# Altium PCB MAGI'sDIPBoard-MBH.PcbDoc
Units mil, origin at the board's own origin, x right, y up, seen from the top; angles counter-clockwise.
Board outline 6000 x 4000 mil, 2 copper layers (Top Layer, Bottom Layer); 26 components, 42 nets, 116 pads, 0 vias.
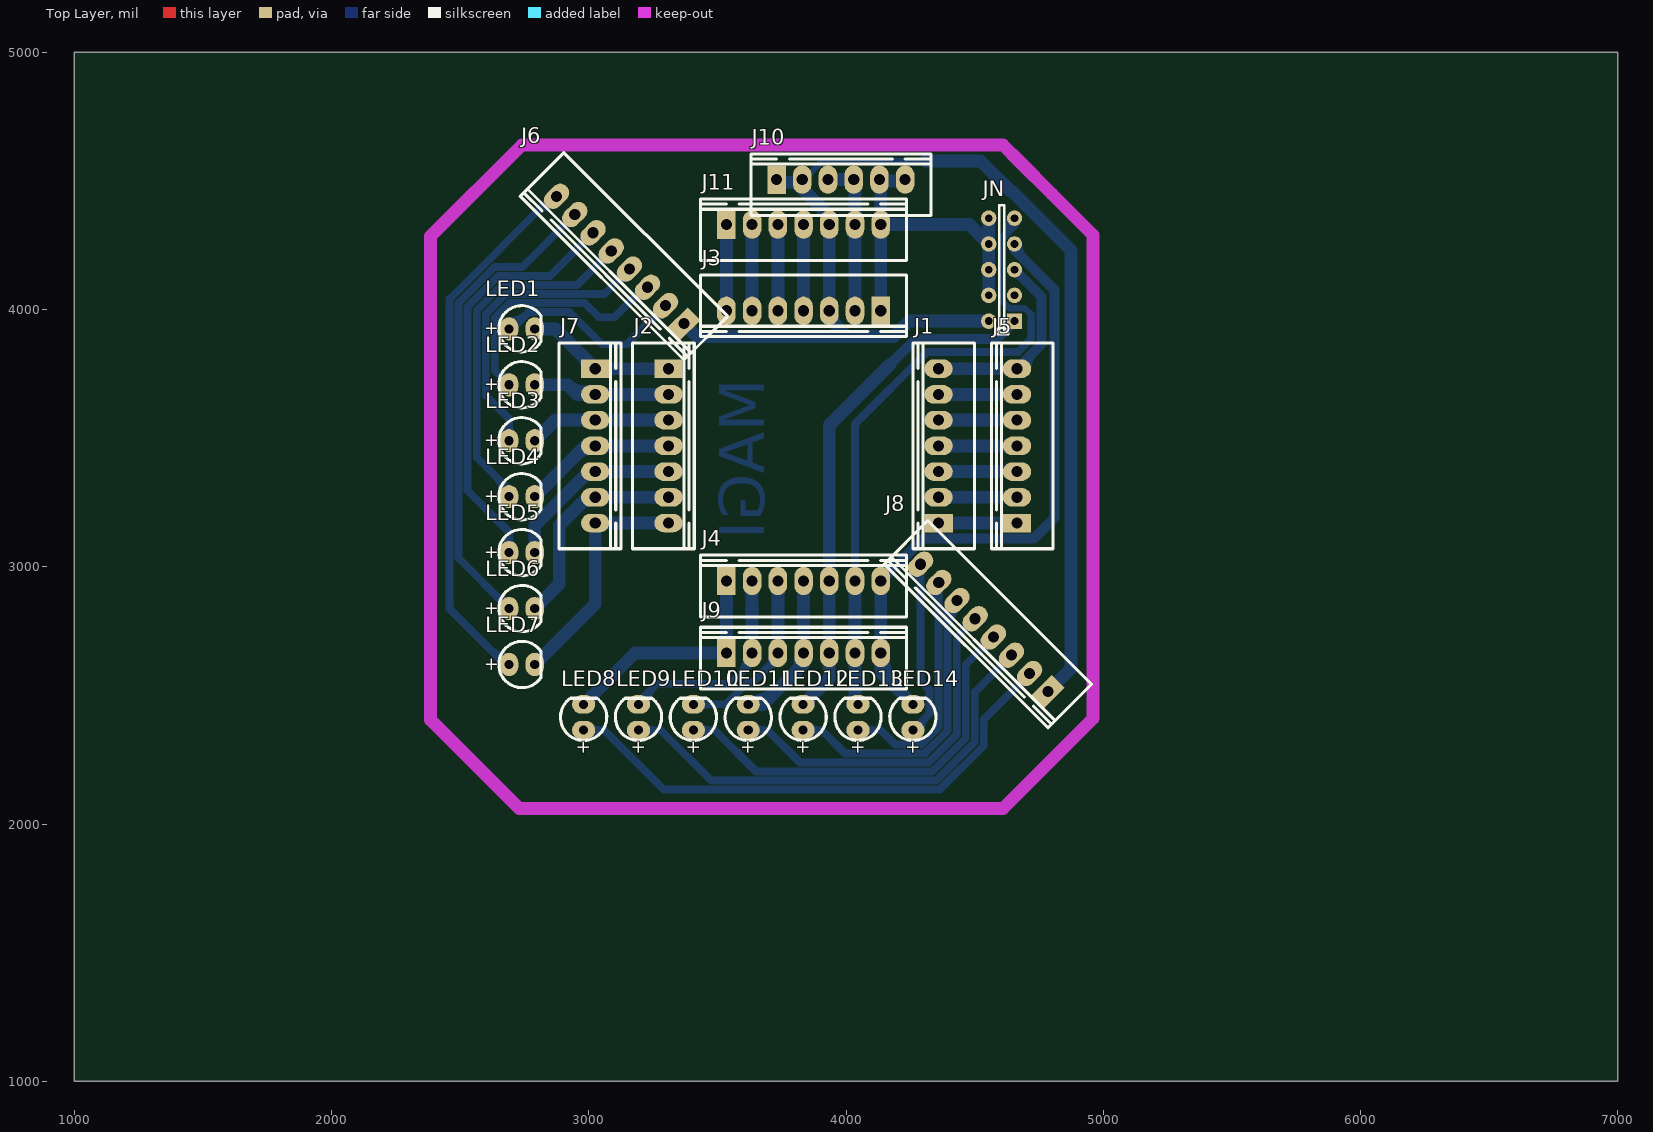
[diagram p0: Top Layer view]
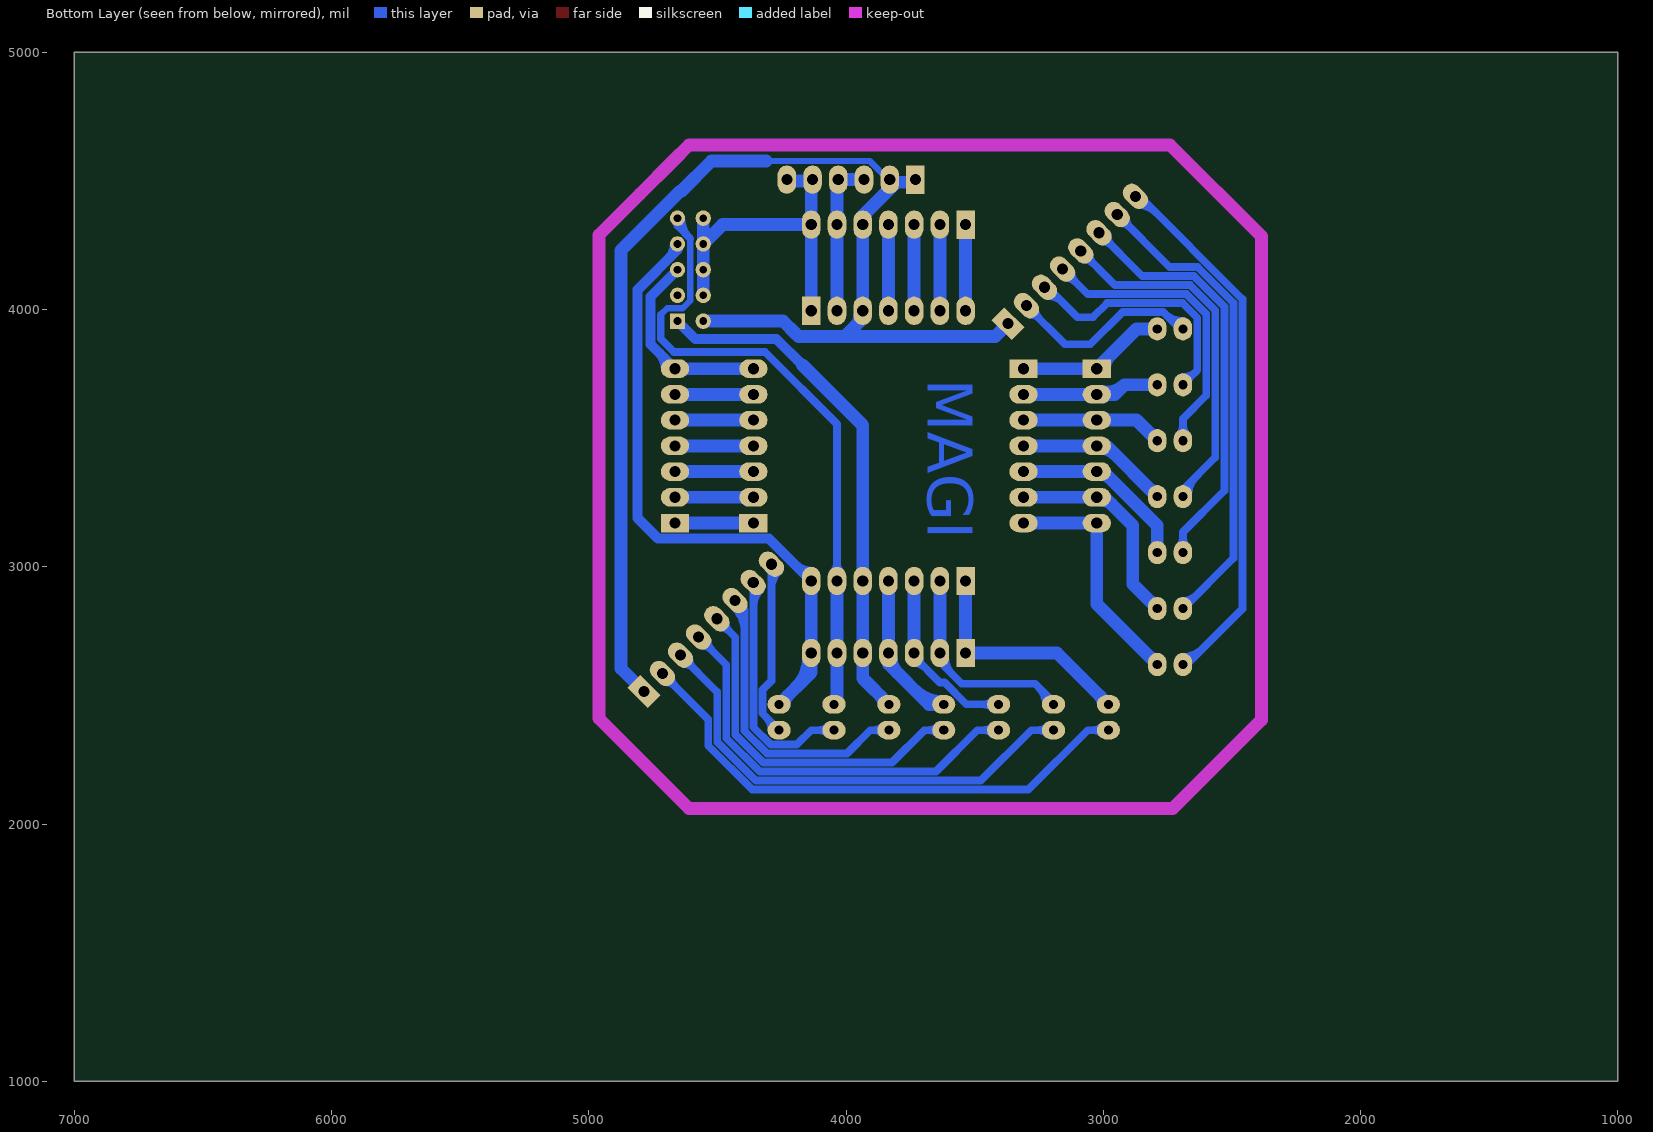
[diagram p1: Bottom Layer view, seen from below]

## Layer stack, top to bottom
Top Layer: signal copper 1.4
Dielectric: dielectric 12.6, FR-4, Dk 4.8
Bottom Layer: signal copper 1.4

## Board outline
1000,1000 7000,1000 7000,5000 1000,5000

## Design rules (kind name [scope] priority, off if disabled: settings)
Clearance [All] p1: gap=5
ComponentClearance [All] p1: gap=0 collisioncheckmode=3 verticalgap=0 showdistances=FALSE
PolygonConnect [All] p1: connectstyle=Relief reliefconductorwidth=10 reliefentries=4 polygonreliefangle="90 Angle" airgapwidth=10
RoutingVias [All] p1: holewidth=28 width=50 viastyle="Through Hole" minholewidth=28 minwidth=50 maxholewidth=28 maxwidth=50
SilkToSilkClearance [All] p1: silktosilkclearance=0
SolderMaskExpansion [All] p1: expansion=4
Width [All] p1: maxlimit=100 minlimit=10 preferedwidth=30
26 further rules are at their usual default settings.

## Components (designator, comment, footprint, x,y, rotation, side; value= is the part's Value field where it differs from the comment)
J1 "CON7" CON7 4360,3170 r90 top
J2 "CON7" CON7 3310,3770 r270 top
J3 "CON7" CON7 4135,3995 r180 top
J4 "CON7" CON7 3535,2945 r0 top
J5 "CON7" CON7 4665,3170 r90 top
J6 "CON8" CON8 3370,3945 r135 top
J7 "CON7" CON7 3025,3770 r270 top
J8 "CON8" CON8 4785,2515 r135 top
J9 "CON7" CON7 3535,2665 r0 top
J10 "CON6" CON6 3730,4505 r0 top
J11 "CON7" CON7 3535,4330 r0 top
JN "AVRISP" AVRISP 4655,3955 r180 top
LED1 "LED_2" LED5 2690,3925 r0 top
LED2 "LED_2" LED5 2690,3707.5 r0 top
LED3 "LED_2" LED5 2690,3490 r0 top
LED4 "LED_2" LED5 2690,3272.5 r0 top
LED5 "LED_2" LED5 2690,3055 r0 top
LED6 "LED_2" LED5 2690,2837.5 r0 top
LED7 "LED_2" LED5 2690,2620 r0 top
LED8 "LED_2" LED5 2980,2365 r90 top
LED9 "LED_2" LED5 3193.33,2365 r90 top
LED10 "LED_2" LED5 3406.67,2365 r90 top
LED11 "LED_2" LED5 3620,2365 r90 top
LED12 "LED_2" LED5 3833.33,2365 r90 top
LED13 "LED_2" LED5 4046.67,2365 r90 top
LED14 "LED_2" LED5 4260,2365 r90 top

## Footprints (in the part's own frame and the unit in brackets; to place one, negate y for a bottom-side part, rotate by r counter-clockwise, add the part's x,y. Pads: shape width x height; smd on the part's side, far side on the other; paste and mask are expansions set on the pad)
AVRISP [mil]
  rect 60x60 hole 30: 1(0,0)
  round 60 hole 30: 2(100,0) 3(0,-100) 4(100,-100) 5(0,-200) 6(100,-200) 7(0,-300) 8(100,-300) 9(0,-400) 10(100,-400)
  silkscreen extent 25,-450 75,50
CON6 [mil]
  rect 72x110 hole 43.31: 1(0,0)
  oval 72x110 hole 43.31: 2(100,0) 3(200,0) 4(300,0) 5(400,0) 6(500,0)
  silkscreen extent -100,-140 600,100
CON7 [mil]
  rect 72x110 hole 43.31: 1(0,0)
  oval 72x110 hole 43.31: 2(100,0) 3(200,0) 4(300,0) 5(400,0) 6(500,0) 7(600,0)
  silkscreen extent -100,-140 700,100
CON8 [mm]
  rect 1.8x2.8 hole 1.1: 1(0,0)
  oval 1.8x2.8 hole 1.1: 2(2.54,0.02) 3(5.08,0) 4(7.62,0) 5(10.16,0) 6(12.7,0) 7(15.24,0) 8(17.78,0)
  silkscreen extent -2.54,-3.56 20.32,2.54
LED5 [mil]
  oval 72x90 hole 35.43: A(0,0) K(100,0)
  silkscreen extent -40,-90 124,90

## Part data
J1 J2 J3 J4 J5 J6 J7 J8 J9 J10 J11: "Connector"

## Nets (pads, with @x,y where several pads share a name; then routed paths per layer and width w, separated by ;. In a path a pad name is that pad's centre, name@x,y a point inside that pad or via, vN(x,y) a via of type N, cw(c..) or ccw(c..) an arc to the next point about the centre after c; other vN are vias at no path point)
GND: J3.1 J10.5 J10.6 J11.7 JN.4 JN.6 JN.8 JN.10 | length 1353.1
  Bottom Layer w50: J3.1 J11.7 ; J10.6 4225,4500 4135,4500 J11.7 ; JN.4 JN.6 JN.8 ; JN.10 JN.8 ; J11.7 4480,4330 JN.8
MISO: J4.6 J9.6 JN.9 LED13.K | length 2655.6
  Bottom Layer w25.59: 4605.24,4275.61 4605.24,4034.39 4634.86,4004.76 4695.24,4004.76 4720.55,3979.45
  Bottom Layer w29.53: J4.6@4019.98,2979.02 ccw(c3983.73,3015.27) 4035,3015.27 ccw(c4086.27,3015.27) J4.6@4050.02,2979.02 ; J4.6 4035,3555 4315,3835 4669.24,3835 4720.55,3886.32 4720.55,3979.45 ; 4605.24,4275.61 4655,4325.38 JN.9 ; 4608.04,4278.42 ccw(c4531.46,4355) JN.9@4639.76,4355
  Bottom Layer w50: J4.6 J9.6 4035,2476.67 LED13.K
MOSI: J4.5 J9.5 JN.1 LED12.K | length 2052.8
  Bottom Layer w39.37: 4170,3785 4270,3885 4585,3885 JN.1
  Bottom Layer w50: LED12.K 3935,2566.67 J9.5 J4.5 3935,3550 4170,3785 ; LED12.K@3853.33,2465 cw(c3901.62,2465) 3867.48,2499.14
NetJ1_1: J1.1 J5.1 | length 305
  Bottom Layer w50: J1.1 J5.1
NetJ1_2: J1.2 J5.2 | length 305
  Bottom Layer w50: J1.2 J5.2
NetJ1_3: J1.3 J5.3 | length 305
  Bottom Layer w50: J1.3 J5.3
NetJ1_4: J1.4 J5.4 | length 305
  Bottom Layer w50: J1.4 J5.4
NetJ1_5: J1.5 J5.5 | length 305
  Bottom Layer w50: J1.5 J5.5
NetJ1_6: J1.6 J5.6 | length 305
  Bottom Layer w50: J1.6 J5.6
NetJ2_1: J2.1 J7.1 LED1.K | length 641.1
  Bottom Layer w50: LED1.K 2870,3925 J7.1 J2.1 ; 2973.79,3821.21 cw(c2922.57,3770) J7.1@2995,3770
NetJ2_2: J2.2 J7.2 LED2.K | length 629.7
  Bottom Layer w50: LED2.K 2917.5,3707.5 ; J7.2@3003.96,3680.81 cw(c2985.99,3775.99) 2917.5,3707.5 ; J2.2 J7.2 2955,3670 2917.5,3707.5
NetJ2_3: J2.3 J7.3 LED3.K | length 591.1
  Bottom Layer w50: LED3.K 2870,3570 J7.3 J2.3 ; LED3.K@2790,3510 ccw(c2790,3558.28) 2824.14,3524.14
NetJ2_4: J2.4 J7.4 LED4.K | length 695.7
  Bottom Layer w50: LED4.K 2987.5,3470 J7.4 J2.4 ; LED4.K@2790,3292.5 ccw(c2790,3340.78) 2824.14,3306.64 ; 2955.64,3438.14 cw(c3006,3387.78) J7.4@3006,3459
NetJ2_5: J2.5 J7.5 LED5.K | length 744.2
  Bottom Layer w50: LED5.K 2790,3160 3000,3370 J7.5 J2.5 ; 2976.98,3346.98 cw(c3006,3317.96) J7.5@3006,3359
NetJ2_6: J2.6 J7.6 LED6.K | length 912.1
  Bottom Layer w50: LED6.K 2885,2932.5 2885,3160 2995,3270 J7.6 J2.6 ; LED6.K@2790,2857.5 ccw(c2790,2905.78) 2824.14,2871.64 ; 2968.44,3243.44 cw(c3006,3205.89) J7.6@3006,3259
NetJ2_7: J2.7 J7.7 LED7.K | length 970.3
  Bottom Layer w50: LED7.K 3025,2855 J7.7 J2.7 ; LED7.K@2790,2640 ccw(c2790,2688.28) 2824.14,2654.14
NetJ3_4: J3.4 J11.4 | length 335
  Bottom Layer w50: J3.4 J11.4
NetJ3_5: J3.5 J11.3 | length 335
  Bottom Layer w50: J3.5 J11.3
NetJ3_6: J3.6 J11.2 | length 335
  Bottom Layer w50: J3.6 J11.2
NetJ3_7: J3.7 J11.1 | length 335
  Bottom Layer w50: J3.7 J11.1
NetJ4_1: J4.1 J9.1 LED8.K | length 955.8
  Bottom Layer w50: LED8.K 3180,2665 J9.1 J4.1 ; LED8.K@3000,2465 cw(c3048.28,2465) 3014.14,2499.14
NetJ4_2: J4.2 J9.2 LED9.K | length 972.7
  Bottom Layer w30: LED9.K 3193.33,2473.33 3265,2545 3550,2545 3620,2615 3620,2650 J9.2 ; LED9.K@3223.33,2465 cw(c3315.88,2465) 3250.44,2530.44 ; 3587.84,2582.84 ccw(c3524.67,2646) J9.2@3614,2646
  Bottom Layer w50: J9.2 J4.2
NetJ4_3: J4.3 J9.3 LED10.K | length 859.2
  Bottom Layer w30: LED10.K 3531.8,2465 3616.8,2550 3635,2550 3735,2650 J9.3 ; LED10.K@3430.52,2450.15 cw(c3466.36,2414.3) 3466.36,2465 cw(c3466.36,2515.7) LED10.K@3430.52,2479.85 ; 3692.32,2607.32 cw(c3735,2564.64) J9.3@3735,2625 ; 3701.98,2616.98 ccw(c3672.96,2646) J9.3@3714,2646
  Bottom Layer w50: J9.3 J4.3
NetJ4_4: J4.4 J9.4 LED11.K | length 780.2
  Bottom Layer w50: LED11.K 3677.33,2465 3835,2622.67 J9.4 J4.4 ; LED11.K@3629,2476 ccw(c3629,2619.24) 3730.29,2517.95 ; 3799.72,2587.39 ccw(c3741.11,2646) J9.4@3824,2646
NetJ6_2: J6.2 LED1.A | length 906.4
  Bottom Layer w30: LED1.A 2701.8,3925 2766.8,3990 2925,3990 3050,3865 3148.58,3865 J6.2 ; LED1.A@2690,3955 ccw(c2690,4055.92) 2761.36,3984.56 ; J6.2@3264.38,4001.23 cw(c3215.05,4001.23) 3249.93,3966.35 cw(c3284.81,3931.47) J6.2@3284.81,3980.8
NetJ6_3: J6.3 LED2.A | length 1091.7
  Bottom Layer w30: 2638.79,3758.71 ccw(c2690,3809.93) LED2.A@2690,3737.5 ; LED2.A 2634,3763.5 2634,3968.2 2690.8,4025 2985,4025 3040,3970 3100,3970 3216.42,4086.42 J6.3 ; 3159.03,4029.03 cw(c3214.66,3973.39) J6.3@3214.66,4052.07
NetJ6_4: J6.4 LED3.A | length 1318.6
  Bottom Layer w30: LED3.A@2675.15,3513.85 ccw(c2639.3,3549.7) 2690,3549.7 ccw(c2740.7,3549.7) LED3.A@2704.85,3513.85 ; LED3.A 2690,3575 2599,3666 2599,3982.69 2676.31,4060 3060.74,4060 J6.4 ; J6.4@3123.52,4143.21 cw(c3074.19,4143.21) 3109.07,4108.33 cw(c3143.95,4073.45) J6.4@3143.95,4122.78
NetJ6_5: J6.5 LED4.A | length 1546.1
  Bottom Layer w30: 2641.78,3347.22 cw(c2576.05,3281.5) LED4.A@2669,3281.5 ; LED4.A 2690,3299 2564,3425 2564,3997.19 2661.81,4095 2954.32,4095 J6.5 ; J6.5@3052.81,4213.92 cw(c3003.48,4213.92) 3038.36,4179.04 cw(c3073.24,4144.16) J6.5@3073.24,4193.49
NetJ6_6: J6.6 LED5.A | length 1786.8
  Bottom Layer w30: LED5.A@2675.15,3078.85 ccw(c2639.3,3114.7) 2690,3114.7 ccw(c2740.7,3114.7) LED5.A@2704.85,3078.85 ; LED5.A 2690,3135 2529,3296 2529,4011.69 2647.31,4130 2847.89,4130 J6.6 ; J6.6@2982.09,4284.63 cw(c2932.76,4284.63) 2967.65,4249.75 cw(c3002.53,4214.87) J6.6@3002.53,4264.2
NetJ6_7: J6.7 LED6.A | length 1998.1
  Bottom Layer w30: 2638.79,2888.71 ccw(c2690,2939.93) LED6.A@2690,2867.5 ; LED6.A 2494,3033.5 2494,4026.19 2632.81,4165 2741.47,4165 J6.7 ; J6.7@2911.38,4355.34 cw(c2862.05,4355.34) 2896.94,4320.46 cw(c2931.82,4285.58) J6.7@2931.82,4334.91
NetJ6_8: J6.8 LED7.A | length 2262.4
  Bottom Layer w30: 2613.18,2681.82 ccw(c2690,2758.64) LED7.A@2690,2650 ; LED7.A 2675,2620 2459,2836 2459,4040.68 2858.29,4439.97 J6.8 ; 2797.66,4379.34 cw(c2861.11,4315.89) J6.8@2861.11,4405.62
NetJ8_2: J8.2 LED8.A | length 2233.2
  Bottom Layer w30: LED8.A 3060,2365 3291,2134 4364.68,2134 4535,2304.32 4535,2406.42 J8.2 ; LED8.A@3003.85,2350.15 cw(c3039.7,2314.3) 3039.7,2365 cw(c3039.7,2415.7) LED8.A@3003.85,2379.85 ; J8.2@4679.38,2571.23 cw(c4630.05,2571.23) 4664.93,2536.35 cw(c4699.81,2501.47) J8.2@4699.81,2550.8
NetJ8_3: J8.3 LED9.A | length 2004.1
  Bottom Layer w30: LED9.A 3280,2365 3476,2169 4350.19,2169 4500,2318.81 4500,2512.84 J8.3 ; LED9.A@3217.18,2350.15 cw(c3253.03,2314.3) 3253.03,2365 cw(c3253.03,2415.7) LED9.A@3217.18,2379.85 ; J8.3@4609.23,2642.5 cw(c4559.9,2642.5) 4594.78,2607.62 cw(c4629.66,2572.74) J8.3@4629.66,2622.07
NetJ8_4: J8.4 LED10.A | length 1774.2
  Bottom Layer w30: LED10.A 3489.15,2365 3650.15,2204 4335.69,2204 4465,2333.31 4465,2619.26 J8.4 ; LED10.A@3430.52,2350.15 cw(c3466.36,2314.3) 3466.36,2365 cw(c3466.36,2415.7) LED10.A@3430.52,2379.85 ; J8.4@4538.52,2713.21 cw(c4489.19,2713.21) 4524.07,2678.33 cw(c4558.95,2643.45) J8.4@4558.95,2692.78
NetJ8_5: J8.5 LED11.A | length 1544.3
  Bottom Layer w30: LED11.A 3695,2365 3821,2239 4321.19,2239 4430,2347.81 4430,2725.68 J8.5 ; LED11.A@3643.85,2350.15 cw(c3679.7,2314.3) 3679.7,2365 cw(c3679.7,2415.7) LED11.A@3643.85,2379.85 ; J8.5@4467.81,2783.92 cw(c4418.48,2783.92) 4453.36,2749.04 cw(c4488.24,2714.16) J8.5@4488.24,2763.49
NetJ8_6: J8.6 LED12.A | length 1378.3
  Bottom Layer w30: LED12.A 3905,2365 3996,2274 4306.69,2274 4395,2362.31 4395,2832.11 J8.6 ; LED12.A@3857.18,2350.15 cw(c3893.03,2314.3) 3893.03,2365 cw(c3893.03,2415.7) LED12.A@3857.18,2379.85 ; 4395,2750.92 cw(c4521.24,2750.92) J8.6@4431.97,2840.19 ; 4395,2823.35 cw(c4448.81,2823.35) J8.6@4410.76,2861.4
NetJ8_7: J8.7 LED13.A | length 1081.1
  Bottom Layer w30: LED13.A 4135,2365 4191,2309 4292.2,2309 4360,2376.8 4360,2938.53 J8.7 ; LED13.A@4070.52,2350.15 cw(c4106.36,2314.3) 4106.36,2365 cw(c4106.36,2415.7) LED13.A@4070.52,2379.85 ; J8.7@4332.37,2910.9 cw(c4265.66,2844.19) 4360,2844.19
NetJ8_8: J8.8 LED14.A | length 819.3
  Bottom Layer w30: LED14.A 4325,2430 4325,2521 4290.03,2555.97 J8.8 ; J8.8@4261.66,2981.61 cw(c4193.17,2913.12) 4290.03,2913.12 ; LED14.A@4290,2365 cw(c4362.43,2365) 4311.21,2416.21
PO: J3.2 J10.3 J10.4 J11.6 | length 612.1
  Bottom Layer w50: J10.3 J10.4 4035,4500 J11.6 J3.2
RST: J1.7 J5.7 JN.5 | length 839.8
  Bottom Layer w39.37: JN.5 4760,4050 4760,3865 J5.7 ; J5.7@4700.32,3770 cw(c4785.57,3770) 4725.29,3830.29
  Bottom Layer w50: J1.7 J5.7
SCK: J4.7 J9.7 JN.7 LED14.K | length 2732.5
  Bottom Layer w39.37: J4.7 4299.31,3109.31 4730.22,3109.31 4810,3189.09 4810,4077.34 4655,4232.34 JN.7 ; J4.7@4135,2980.32 ccw(c4135,3065.57) 4195.29,3005.29 ; JN.7@4665.31,4255 ccw(c4744.93,4255) 4688.63,4198.7
  Bottom Layer w50: J4.7 J9.7 4135,2590 LED14.K ; J9.7@4146,2646 ccw(c4307.75,2646) 4193.38,2531.62 ; 4225.86,2499.14 cw(c4191.72,2465) LED14.K@4240,2465
VCC: J3.3 J6.1 J8.1 J10.1 J10.2 J11.5 JN.2 | length 5005.7
  Bottom Layer w25: J10.2 3835.34,4505 3907.84,4577.5 4310,4577.5 ; 4640,4460 4645,4460
  Bottom Layer w50: J6.1 3420,3895 4005,3895 ; J10.1 3740,4495 3805,4495 3935,4365 J11.5 J3.3 3935,3965 4005,3895 ; J3.3@3946,3976 ccw(c3999.11,3976) 3961.56,3938.44 ; 4310,4577.5 4522.5,4577.5 4640,4460 ; JN.2 4244.73,3955 4195.31,3905.58 4195.31,3905.32 4185,3895 4005,3895 ; 4645,4460 4875,4230 4875,2605 J8.1
pads on no net: JN.3

## Keep-outs
Keep-Out Layer:
  lines w50: 4960,4245 4960,4290 4801.25,4448.75 4673.75,4576.25 4610,4640 4580,4640 2740,4640 2385,4285 2385,2405 2730,2060 4610,2060 4960,2410 4960,4260

## Other copper
Bottom Layer:
  text "MAGI" at 3740,3730 h300 r90

## Text inside footprints (layer, text, board x,y; h text height)
LED1: Top Overlay "+" at 2594,3903 h50
LED2: Top Overlay "+" at 2594,3685.5 h50
LED3: Top Overlay "+" at 2594,3468 h50
LED4: Top Overlay "+" at 2594,3250.5 h50
LED5: Top Overlay "+" at 2594,3033 h50
LED6: Top Overlay "+" at 2594,2815.5 h50
LED7: Top Overlay "+" at 2594,2598 h50
LED8: Top Overlay "+" at 3002,2269 h50 r90
LED9: Top Overlay "+" at 3215.33,2269 h50 r90
LED10: Top Overlay "+" at 3428.67,2269 h50 r90
LED11: Top Overlay "+" at 3642,2269 h50 r90
LED12: Top Overlay "+" at 3855.33,2269 h50 r90
LED13: Top Overlay "+" at 4068.67,2269 h50 r90
LED14: Top Overlay "+" at 4282,2269 h50 r90